# Altium PCB 音乐频谱分析仪.PcbDoc
Units mm, origin at the board's own origin, x right, y up, seen from the top; angles counter-clockwise.
Board outline 70.74 x 84.96 mm, 4 copper layers (Top Layer, Internal Plane 1, Internal Plane 2, Bottom Layer); 35 components, 29 nets, 104 pads, 0 vias.
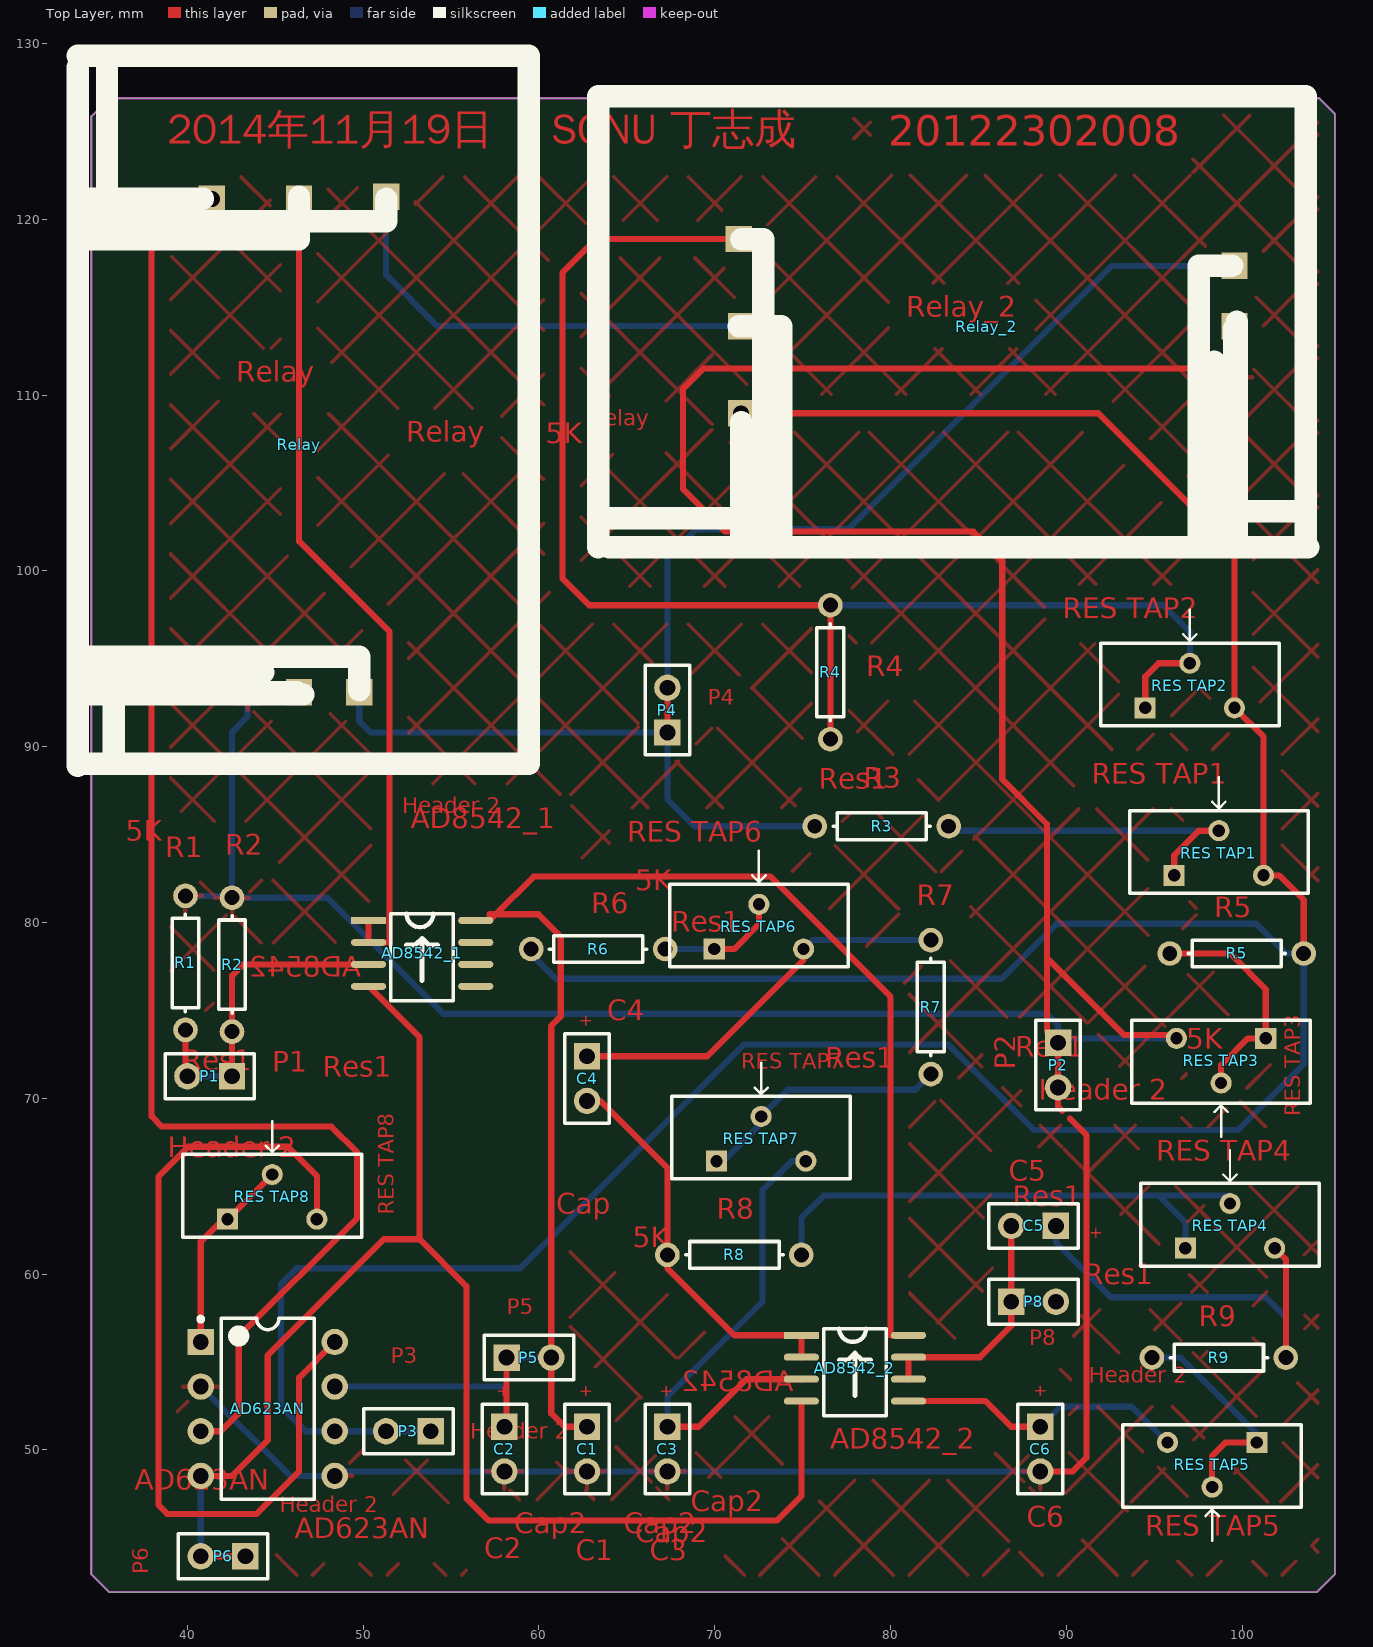
[diagram p0: Top Layer view]
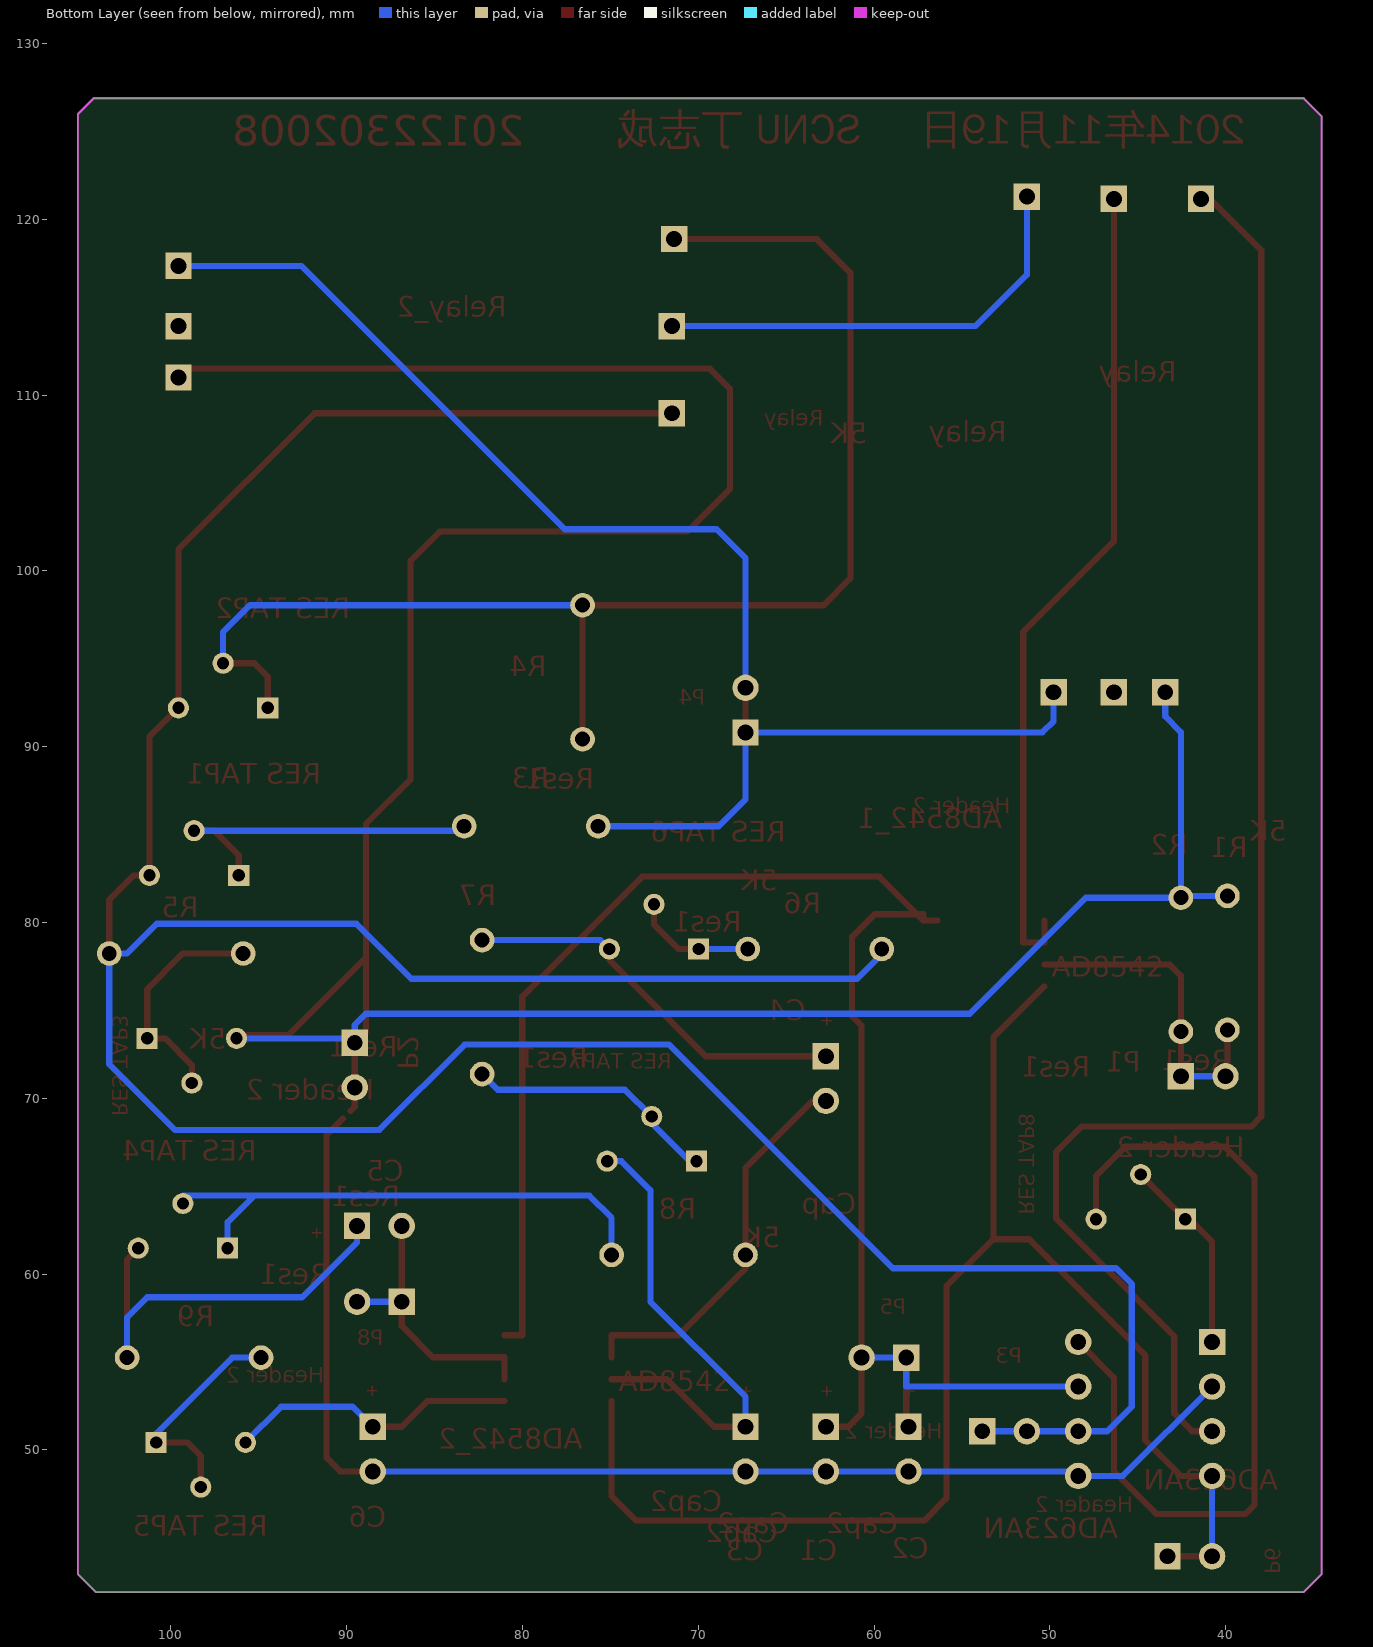
[diagram p1: Bottom Layer view, seen from below]
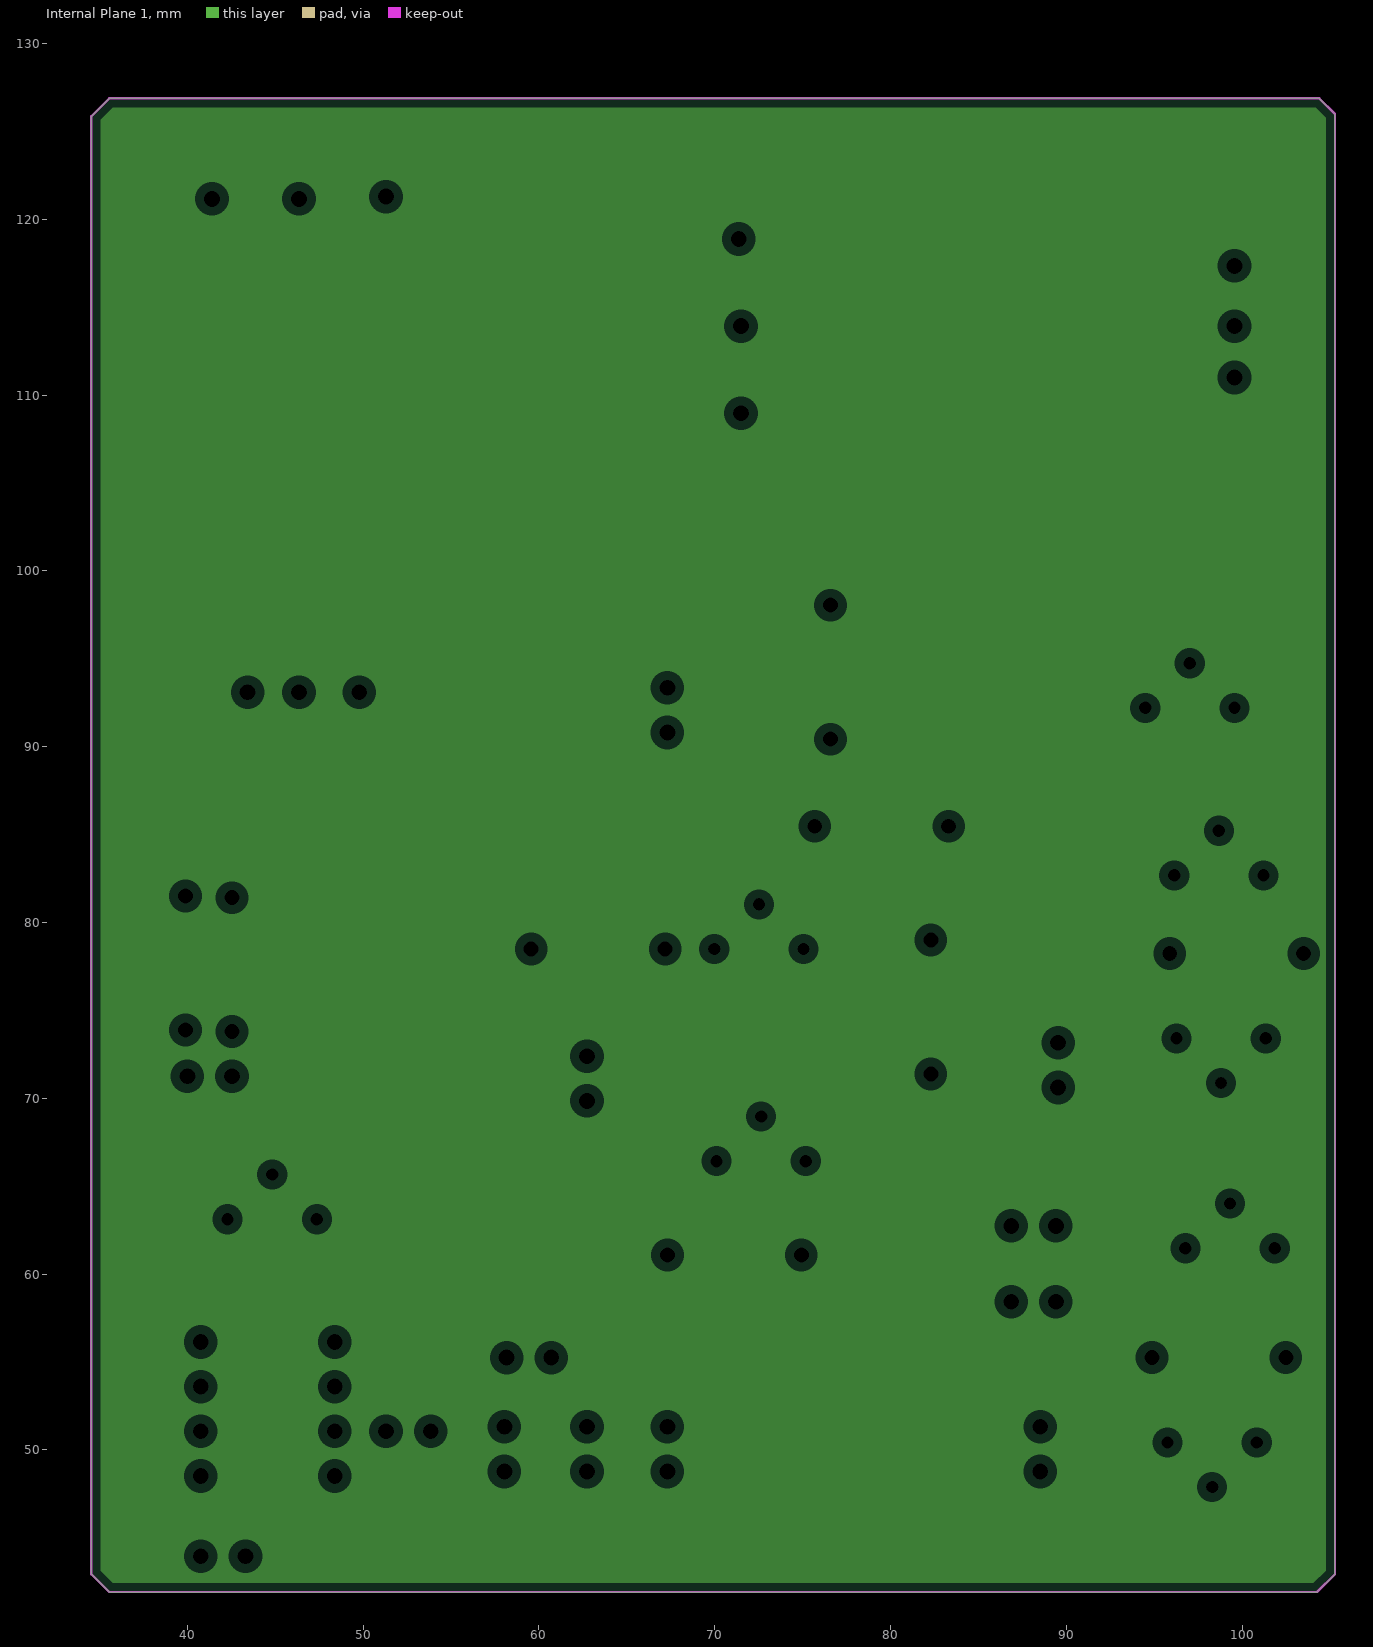
[diagram p2: Internal Plane 1, clearances drawn from the general rule]
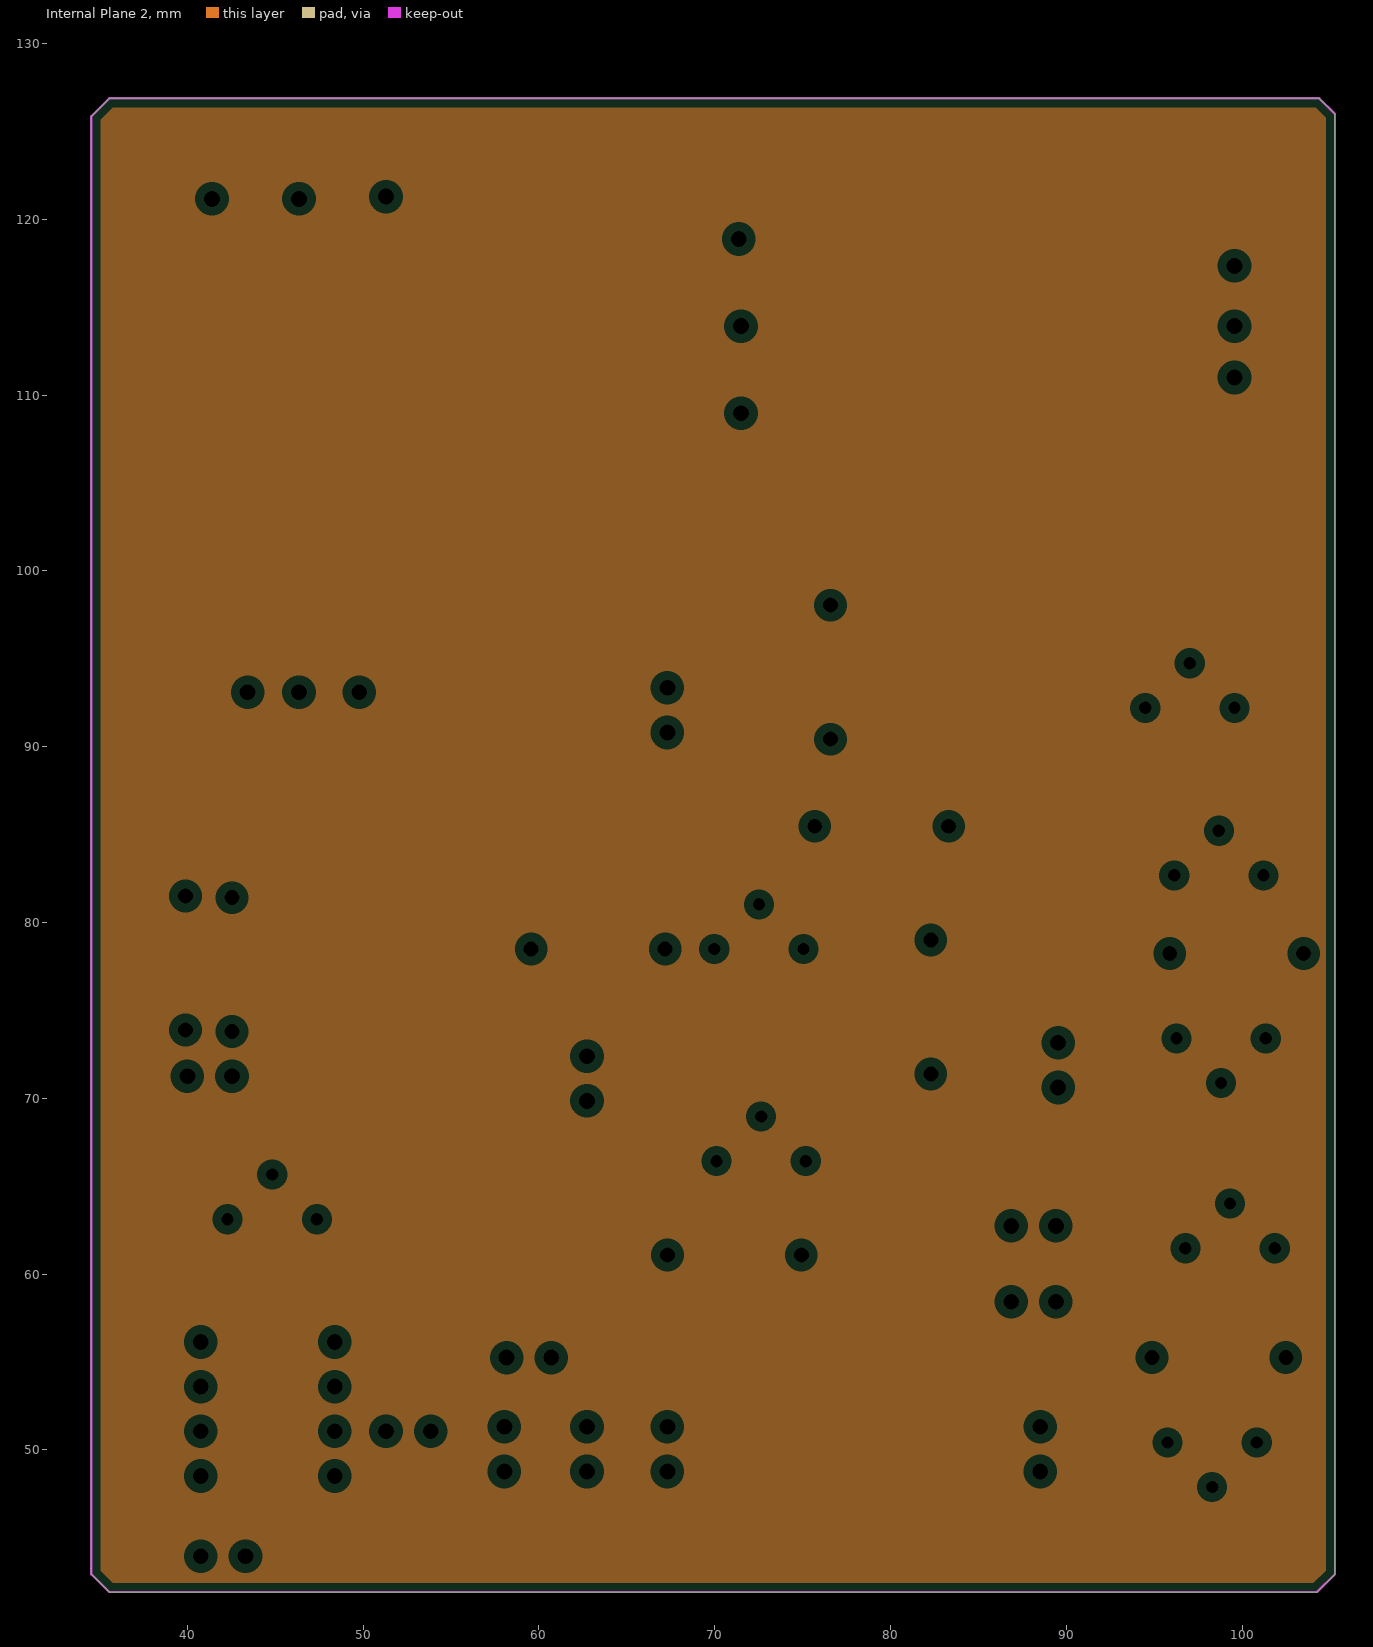
[diagram p3: Internal Plane 2, clearances drawn from the general rule]

## Layer stack, top to bottom
Top Layer: signal copper 0.0356
Dielectric: dielectric 0.32, FR-4, Dk 4.8
Internal Plane 1: plane copper 0.0356
Dielectric: dielectric 0.32, FR-4, Dk 4.8
Internal Plane 2: plane copper 0.0356
Dielectric: dielectric 0.32, FR-4, Dk 4.8
Bottom Layer: signal copper 0.0356

## Board outline
34.544,42.926 34.544,125.857 35.56,126.873 104.394,126.873 105.283,125.984 105.283,42.926 104.267,41.91 35.56,41.91

## Design rules (kind name [scope] priority, off if disabled: settings)
Clearance [All] p1: gap=0.8
PlaneClearance [All] p1: clearance=0.508
PlaneConnect [All] p1: planeconnectstyle=Relief reliefexpansion=0.508 reliefentries=4 reliefconductorwidth=0.254 reliefairgap=0.254
PolygonConnect [All] p1: connectstyle=Relief reliefconductorwidth=0.254 reliefentries=4 polygonreliefangle="90 Angle" airgapwidth=0.254
RoutingVias [All] p1: holewidth=0.8 width=1.6 viastyle="Through Hole" minholewidth=0.711 minwidth=1.27 maxholewidth=0.711 maxwidth=1.27
SolderMaskExpansion [All] p1: expansion=0.102
Width [All] p1: maxlimit=0.35 minlimit=0.35 preferedwidth=0.35
26 further rules are at their usual default settings.

## Components (designator, comment, footprint, x,y, rotation, side; value= is the part's Value field where it differs from the comment)
AD623AN "AD623AN" AD623AN 40.767,56.134 r0 top
AD8542_1 "AD8542" AD8542 50.311,80.11 r0 top
AD8542_2 "AD8542" AD8542 74.93,56.515 r0 top
C1 "Cap2" BAT-2 62.738,50.038 r270 top
C2 "Cap2" BAT-2 58.039,50.038 r270 top
C3 "Cap2" BAT-2 67.31,50.038 r270 top
C4 "Cap" BAT-2 62.738,71.12 r270 top
C5 "Cap" BAT-2 88.138,62.738 r180 top
C6 "Cap2" BAT-2 88.519,50.038 r270 top
P1 "Header 2" HDR1X2 42.545,71.247 r180 top
P2 "Header 2" HDR1X2 89.535,73.152 r270 top
P3 "Header 2" HDR1X2 53.848,51.054 r180 top
P4 "Header 2" HDR1X2 67.31,90.805 r90 top
P5 "Header 2" HDR1X2 58.166,55.245 r0 top
P6 "Header 2" HDR1X2 43.307,43.942 r180 top
P8 "Header 2" HDR1X2 86.868,58.42 r0 top
R1 "Res1" AXIAL-0.3 39.897,77.697 r270 top
R2 "Res1" AXIAL-0.3 42.545,77.597 r270 top
R3 "Res1" AXIAL-0.3 79.502,85.471 r180 top
R4 "Res1" AXIAL-0.3 76.581,94.234 r270 top
R5 "Res1" AXIAL-0.3 99.695,78.232 r0 top
R6 "Res1" AXIAL-0.3 63.373,78.486 r180 top
R7 "Res1" AXIAL-0.3 82.296,75.184 r90 top
R8 "Res1" AXIAL-0.3 71.12,61.087 r180 top
R9 "Res1" AXIAL-0.3 98.679,55.245 r0 top
Relay "Relay" Relay 51.308,121.285 r270 top
Relay_2 "Relay" Relay 71.374,118.872 r0 top
"RES TAP1" "5K" "RES TAP2" 72.009,78.105 r0 top
"RES TAP2" "5K" "RES TAP2" 70.358,87.63 r0 top
"RES TAP3" "5K" "RES TAP2" 125.476,77.978 r180 top
"RES TAP4" "5K" "RES TAP2" 72.644,56.896 r0 top
"RES TAP5" "5K" "RES TAP2" 124.968,54.991 r180 top
"RES TAP6" "5K" "RES TAP2" 45.847,73.914 r0 top
"RES TAP7" "5K" "RES TAP2" 45.974,61.849 r0 top
"RES TAP8" "5K" "RES TAP2" 18.161,58.547 r0 top

## Footprints (in the part's own frame and the unit in brackets; to place one, negate y for a bottom-side part, rotate by r counter-clockwise, add the part's x,y. Pads: shape width x height; smd on the part's side, far side on the other; paste and mask are expansions set on the pad)
AD623AN [mm]
  rect 1.5x1.5 hole 0.9: 1(0,0)
  round 1.5 hole 0.9: 2(0,-2.54) 3(0,-5.08) 4(0,-7.62) 5(7.62,-7.62) 6(7.62,-5.08) 7(7.62,-2.54) 8(7.62,0)
  silkscreen extent -0.12,-8.96 6.46,1.42, body extent 0.21,-8.96 7.41,1.34, height 5.08
AD8542 [mm]
  rect 2x0.4 smd: 1(0,0)
  oval 2x0.4 smd: 2(0,-1.249) 3(0,-2.498) 4(0,-3.746) 5(6.096,-3.746) 6(6.096,-2.498) 7(6.096,-1.249) 8(6.096,0)
  silkscreen extent 1.27,-4.57 4.83,0.38
AXIAL-0.3 [mm] "Axial Device, Thru-Hole; 2 Leads; 0.3 in Pin Spacing"
  round 1.4 hole 0.85: 1(-3.81,0) 2(3.81,0)
  silkscreen extent -2.77,-0.76 2.77,0.76
BAT-2 [mm] "Battery; 2 Leads"
  rect 1.5x1.5 hole 0.9: 1(-1.27,0)
  round 1.5 hole 0.9: 2(1.27,0)
  silkscreen extent -2.54,-1.27 2.54,1.27
HDR1X2 [mm] "Connector; Header; 2 Position"
  rect 1.5x1.5 hole 0.9: 1(0,0)
  round 1.5 hole 0.9: 2(2.54,0)
  silkscreen extent -1.27,-1.27 3.81,1.27
Relay [mm]
  rect 1.5x1.5 hole 0.9: 1(0,0) 2(0.127,-4.953) 3(0.127,-9.906) 4(28.194,-7.874) 5(28.194,-4.953) 6(28.194,-1.524)
  silkscreen extent -8,-17.53 32.39,8.13
"RES TAP2" [mm]
  rect 1.2x1.2 hole 0.7: 1(24.13,4.572)
  round 1.2 hole 0.7: 2(26.67,7.112) 3(29.21,4.572)
  silkscreen extent 21.59,3.56 31.75,10.16

## Part data
C1 C2 C3 C4 C5 C6: "Capacitor"
P1 P2 P3 P4 P5 P6 P8: "Header, 2-Pin"
R1 R2 R3 R4 R5 R6 R7 R8 R9: "Resistor"
"RES TAP1" "RES TAP2" "RES TAP3" "RES TAP4" "RES TAP5" "RES TAP6" "RES TAP7" "RES TAP8": library part "RES TAP2"

## Nets (pads, with @x,y where several pads share a name; then routed paths per layer and width w, separated by ;. In a path a pad name is that pad's centre, name@x,y a point inside that pad or via, vN(x,y) a via of type N, cw(c..) or ccw(c..) an arc to the next point about the centre after c; other vN are vias at no path point)
+IN1: AD8542_1.3 P1.1 P1.2 R1.2 R2.2 | length 19
  Top Layer w0.35: R1.2 39.897,71.247 P1.2 ; P1.1 R2.2 42.545,76.962 43.195,77.612 AD8542_1.3
  Bottom Layer w0.35: P1.2 P1.1
+IN2: AD8542_1.5
+IN3: "RES TAP7.3" AD8542_2.3 C3.1 | length 27.6
  Top Layer w0.35: C3.1 69.088,51.308 71.797,54.017 AD8542_2.3
  Bottom Layer w0.35: C3.1 67.31,53.01 72.72,58.42 72.72,64.77 74.371,66.421 75.184,66.421
+IN4: "RES TAP5.3" AD8542_2.5 C6.1 | length 16.7
  Top Layer w0.35: AD8542_2.5 85.407,52.768 86.868,51.308 C6.1
  Bottom Layer w0.35: C6.1 89.662,52.451 93.726,52.451 95.758,50.419
-IN1: AD8542_1.1 AD8542_1.2 Relay.2 | length 46.9
  Top Layer w0.35: Relay.2 46.355,101.676 51.511,96.52 51.511,78.861 AD8542_1.2 AD8542_1.1
-IN2: AD8542_1.6
-IN3: AD8542_2.1 AD8542_2.2 C4.2 R8.2 | length 22.3
  Top Layer w0.35: C4.2 63.5,69.85 67.31,66.04 R8.2 67.31,60.325 71.12,56.515 AD8542_2.1 AD8542_2.2
-IN4: AD8542_2.6 AD8542_2.7 C5.2 P8.1 P8.2 | length 16.1
  Top Layer w0.35: AD8542_2.6 AD8542_2.7 85.09,55.266 86.868,57.044 P8.1 C5.2
  Bottom Layer w0.35: P8.1 P8.2
CONTROL1: Relay.5
CONTROL2: Relay_2.5
DECREASE: Relay.1 Relay_2.2 | length 25.8
  Bottom Layer w0.35: Relay.1 51.308,116.84 54.229,113.919 Relay_2.2
DECREASE_EN: "RES TAP2.1" "RES TAP2.2" R4.1 R4.2 Relay_2.1 | length 79.2
  Top Layer w0.35: Relay_2.1 63.246,118.872 61.341,116.967 61.341,99.568 62.865,98.044 R4.1 R4.2 ; 94.488,92.202 94.488,93.98 95.25,94.742 97.028,94.742
  Bottom Layer w0.35: R4.1 95.504,98.044 97.028,96.52 97.028,94.742
GND: "RES TAP3.3" AD623AN.2 AD623AN.5 C1.2 C2.2 C3.2 C6.2 P2.1 P2.2 R1.1 R2.1 Relay.4 Relay_2.4 | length 244.9
  Top Layer w0.35: C6.2 90.373,48.768 91.146,49.54 91.146,67.909 90.221,68.834 ; 89.768,69.286 89.535,69.52 P2.2 P2.1 88.9,73.787 88.9,77.978 ; 96.456,73.596 93.281,73.596 88.9,77.978 ; Relay_2.4 99.06,111.506 69.342,111.506 68.199,110.363 68.199,104.648 70.612,102.235 84.709,102.235 86.36,100.584 86.36,88.138 88.9,85.598 88.9,77.978
  Bottom Layer w0.35: R1.1 R2.1@42.545,81.507 ; AD623AN.2 45.847,48.514 AD623AN.5 48.387,48.768 C2.2 C1.2 C3.2 C6.2 ; Relay.4 43.434,91.719 42.545,90.83 R2.1@42.545,81.507 ; P2.1 P2.1@89.535,73.406 ; 96.266,73.406 P2.1@89.535,73.406 ; R2.1@42.545,81.507 R2.1 47.955,81.407 54.559,74.803 88.9,74.803 89.535,74.168 P2.1@89.535,73.406
INCREASE: AD623AN.3 Relay.3 | length 86.7
  Top Layer w0.35: AD623AN.3 41.91,51.054 42.926,52.07 42.926,56.447 49.657,63.178 49.657,66.929 48.201,68.385 38.549,68.385 37.973,68.961 37.973,118.237 40.894,121.158 Relay.3
"LPF IN": "RES TAP1.3" "RES TAP2.3" AD623AN.6 P3.1 P3.2 R5.2 R6.2 Relay_2.3 | length 193
  Top Layer w0.35: Relay_2.3 91.821,108.966 99.568,101.219 99.568,92.202 101.219,90.551 101.219,82.677 102.108,82.677 103.505,81.28 R5.2
  Bottom Layer w0.35: P3.1 P3.2 49.86,51.054 AD623AN.6 46.736,51.054 45.339,52.451 45.339,59.436 46.228,60.325 58.928,60.325 71.655,73.052 83.285,73.052 88.138,68.199 99.771,68.199 103.505,71.933 R5.2 102.489,78.232 100.801,79.92 89.445,79.92 86.323,76.798 60.96,76.798 59.563,78.195 R6.2
NetAD623AN_1: "RES TAP8.1" "RES TAP8.2" AD623AN.1 | length 11.4
  Top Layer w0.35: AD623AN.1 40.767,61.849 42.037,63.119 42.291,63.119 44.831,65.659
NetAD623AN_8: "RES TAP8.3" AD623AN.8 | length 49
  Top Layer w0.35: 47.371,63.119 47.371,65.583 45.719,67.235 40.057,67.235 38.354,65.532 38.354,46.863 38.862,46.355 43.942,46.355 46.355,48.768 46.355,54.102 AD623AN.8
NetC4_1: "RES TAP6.3" C4.1 R7.2 | length 22.7
  Top Layer w0.35: C4.1 69.571,72.39 75.057,77.876 75.057,78.486
  Bottom Layer w0.35: 75.057,78.486 75.565,78.994 R7.2
NetC5_1: "RES TAP4.3" C5.1 R9.2 | length 24.6
  Top Layer w0.35: 101.854,61.468 102.489,60.833 R9.2
  Bottom Layer w0.35: C5.1 89.408,61.798 92.532,58.674 101.346,58.674 102.489,57.531 R9.2
NetR3_1: "RES TAP1.1" "RES TAP1.2" R3.1 | length 19.9
  Top Layer w0.35: 96.139,82.677 96.139,83.82 97.536,85.217 98.679,85.217
  Bottom Layer w0.35: R3.1 83.312,85.217 98.679,85.217
NetR5_1: "RES TAP3.1" "RES TAP3.2" R5.1 | length 13.3
  Top Layer w0.35: R5.1 99.314,78.232 101.346,76.2 101.346,73.406 100.33,73.406 98.806,71.882 98.806,70.866
NetR6_1: "RES TAP6.1" "RES TAP6.2" R6.1 | length 7.1
  Top Layer w0.35: 69.977,78.486 71.12,78.486 72.517,79.883 72.517,81.026
  Bottom Layer w0.35: R6.1 69.977,78.486
NetR7_1: "RES TAP7.1" "RES TAP7.2" R7.1 | length 14.5
  Bottom Layer w0.35: 70.104,66.421 70.485,66.421 72.644,68.58 72.644,68.961 74.168,70.485 81.407,70.485 R7.1
NetR8_1: "RES TAP4.1" "RES TAP4.2" R8.1 | length 50.2
  Bottom Layer w0.35: R8.1 74.93,63.195 76.2,64.465 ; 96.774,61.468 96.774,62.941 95.25,64.465 ; 99.314,64.008 99.314,64.465 95.25,64.465 ; 76.2,64.465 95.25,64.465 ; 76.2,64.465 76.205,64.47 95.245,64.47 95.25,64.465
NetR9_1: "RES TAP5.1" "RES TAP5.2" R9.1 | length 12.9
  Top Layer w0.35: 98.298,47.879 98.298,49.657 99.06,50.419 100.838,50.419
  Bottom Layer w0.35: R9.1 96.52,55.245 100.838,50.927 100.838,50.419
"OUT 2": AD8542_1.7
VCC: P4.1 P4.2 R3.2 Relay.6 Relay_2.6 | length 81.3
  Top Layer w0.35: P4.1 P4.2
  Bottom Layer w0.35: Relay.6 49.784,91.44 50.419,90.805 P4.1 67.31,86.995 68.834,85.471 R3.2 ; P4.2 67.31,100.711 68.961,102.362 77.597,102.362 92.583,117.348 Relay_2.6
VCC+10: AD623AN.7 AD8542_1.8 AD8542_2.8 C1.1 C2.1 P5.1 P5.2 | length 100.3
  Top Layer w0.35: AD8542_1.8 AD8542_1.8@57.201,80.11 ; C2.1 58.166,51.435 P5.1 ; C1.1 61.468,51.308 60.706,52.07 P5.2 60.706,74.117 61.245,74.656 61.245,79.192 59.969,80.467 57.558,80.467 ; AD8542_2.8 80.01,56.515 80.01,75.781 73.185,82.607 59.697,82.607 57.558,80.467 ; AD8542_1.8@57.201,80.11 57.201,80.467 57.558,80.467 ; AD8542_1.8@57.201,80.11 57.558,80.467
  Bottom Layer w0.35: AD623AN.7 58.166,53.594 P5.1 P5.2
VEE-10: AD623AN.4 AD8542_1.4 AD8542_2.4 P6.1 P6.2 | length 84.9
  Top Layer w0.35: P6.2 P6.1 ; AD623AN.4 42.545,48.514 44.577,50.546 44.577,55.372 51.181,61.976 53.213,61.976 ; AD8542_1.4 53.213,73.462 53.213,61.976 ; AD8542_2.4 74.93,47.371 73.533,45.974 57.15,45.974 55.88,47.244 55.88,59.309 53.213,61.976
  Bottom Layer w0.35: P6.2 AD623AN.4

## Polygon pours and split planes (outlines as drawn)
GND on Top Layer "Top Layer-No Net" (hatched 45Degree grid 3 track 0.2, remove dead copper, pour order 6): 18.669,130.937 21.463,133.731 57.658,133.731 124.841,133.731 131.318,127.254 125.476,121.412 125.476,36.068 24.003,36.068 16.256,28.321
no net on Internal Plane 1 (split plane): 104.773,125.773 104.773,43.137 104.056,42.42 35.771,42.42 35.054,43.137 35.054,125.646 35.771,126.363 104.183,126.363
no net on Internal Plane 2 (split plane): 104.773,125.773 104.773,43.137 104.056,42.42 35.771,42.42 35.054,43.137 35.054,125.646 35.771,126.363 104.183,126.363

## Keep-outs
Keep-Out Layer:
  lines w0.135: 34.544,42.926 34.544,125.857 35.56,126.873 104.394,126.873 105.283,125.984 105.283,43.18 105.283,42.926 104.267,41.91 35.56,41.91 34.544,42.926

## Other copper
Top Layer:
  text "2014年11月19日" at 38.862,123.698 h3
  text "SCNU 丁志成" at 60.706,123.698 h3
  text "20122302008" at 79.883,123.571 h3

## Text inside footprints (layer, text, board x,y; h text height)
C1: Top Layer "+" at 62.161,53.708 h1.15 r270
C2: Top Layer "+" at 57.462,53.708 h1.15 r270
C3: Top Layer "+" at 66.733,53.708 h1.15 r270
C4: Top Layer "+" at 62.161,74.79 h1.15 r270
C5: Top Layer "+" at 92.075,62.865 h1.15 r180
C6: Top Layer "+" at 88.011,53.721 h1.15 r270